# Altium PCB PCB1.PcbDoc
Units mm, origin at the board's own origin, x right, y up, seen from the top; angles counter-clockwise.
Board outline 143.76 x 165.46 mm, 2 copper layers (Top Layer, Bottom Layer); 9 components, 19 nets, 75 pads, 0 vias.
Unrouted connection lines stored in the file: 3.
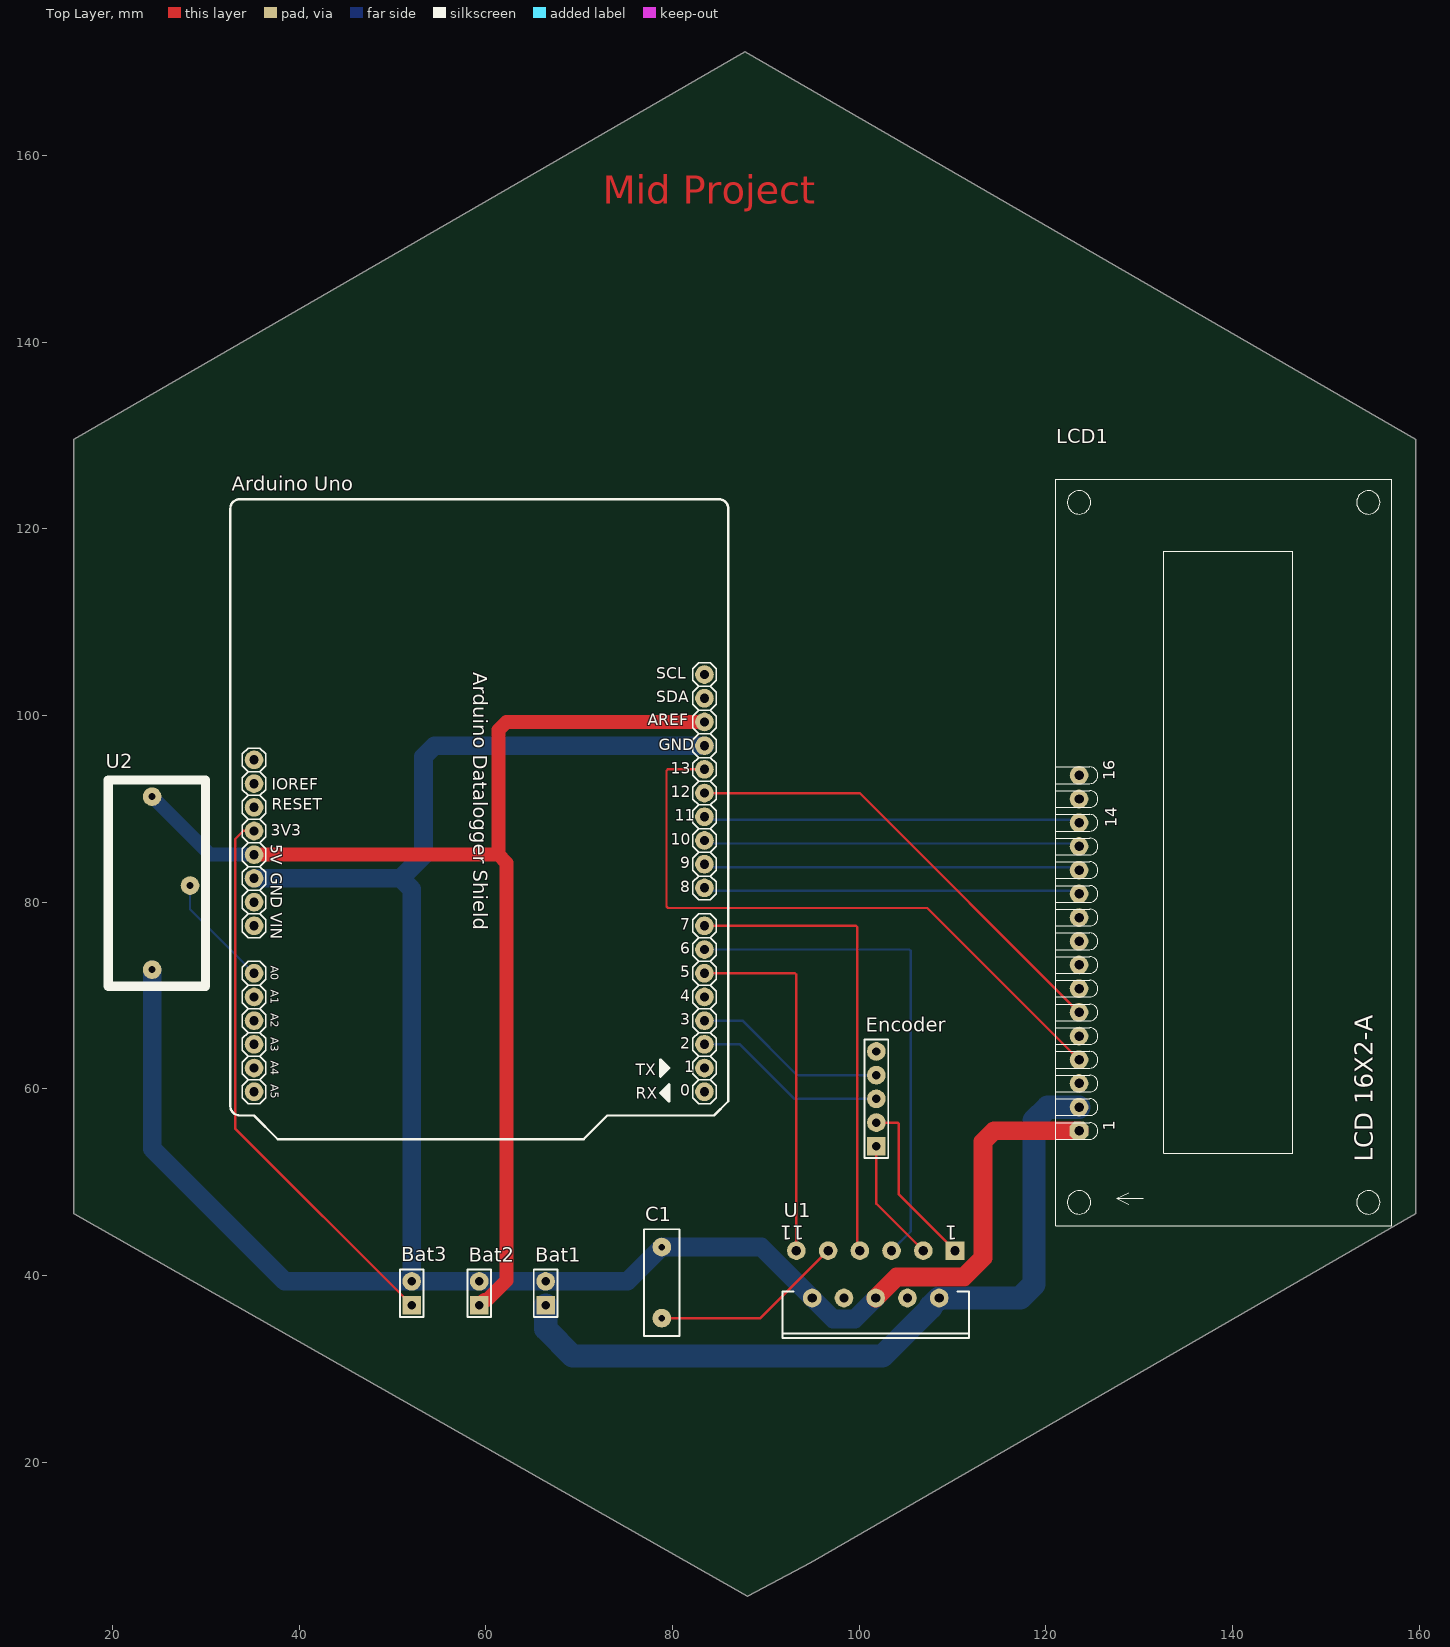
[diagram p0: Top Layer view]
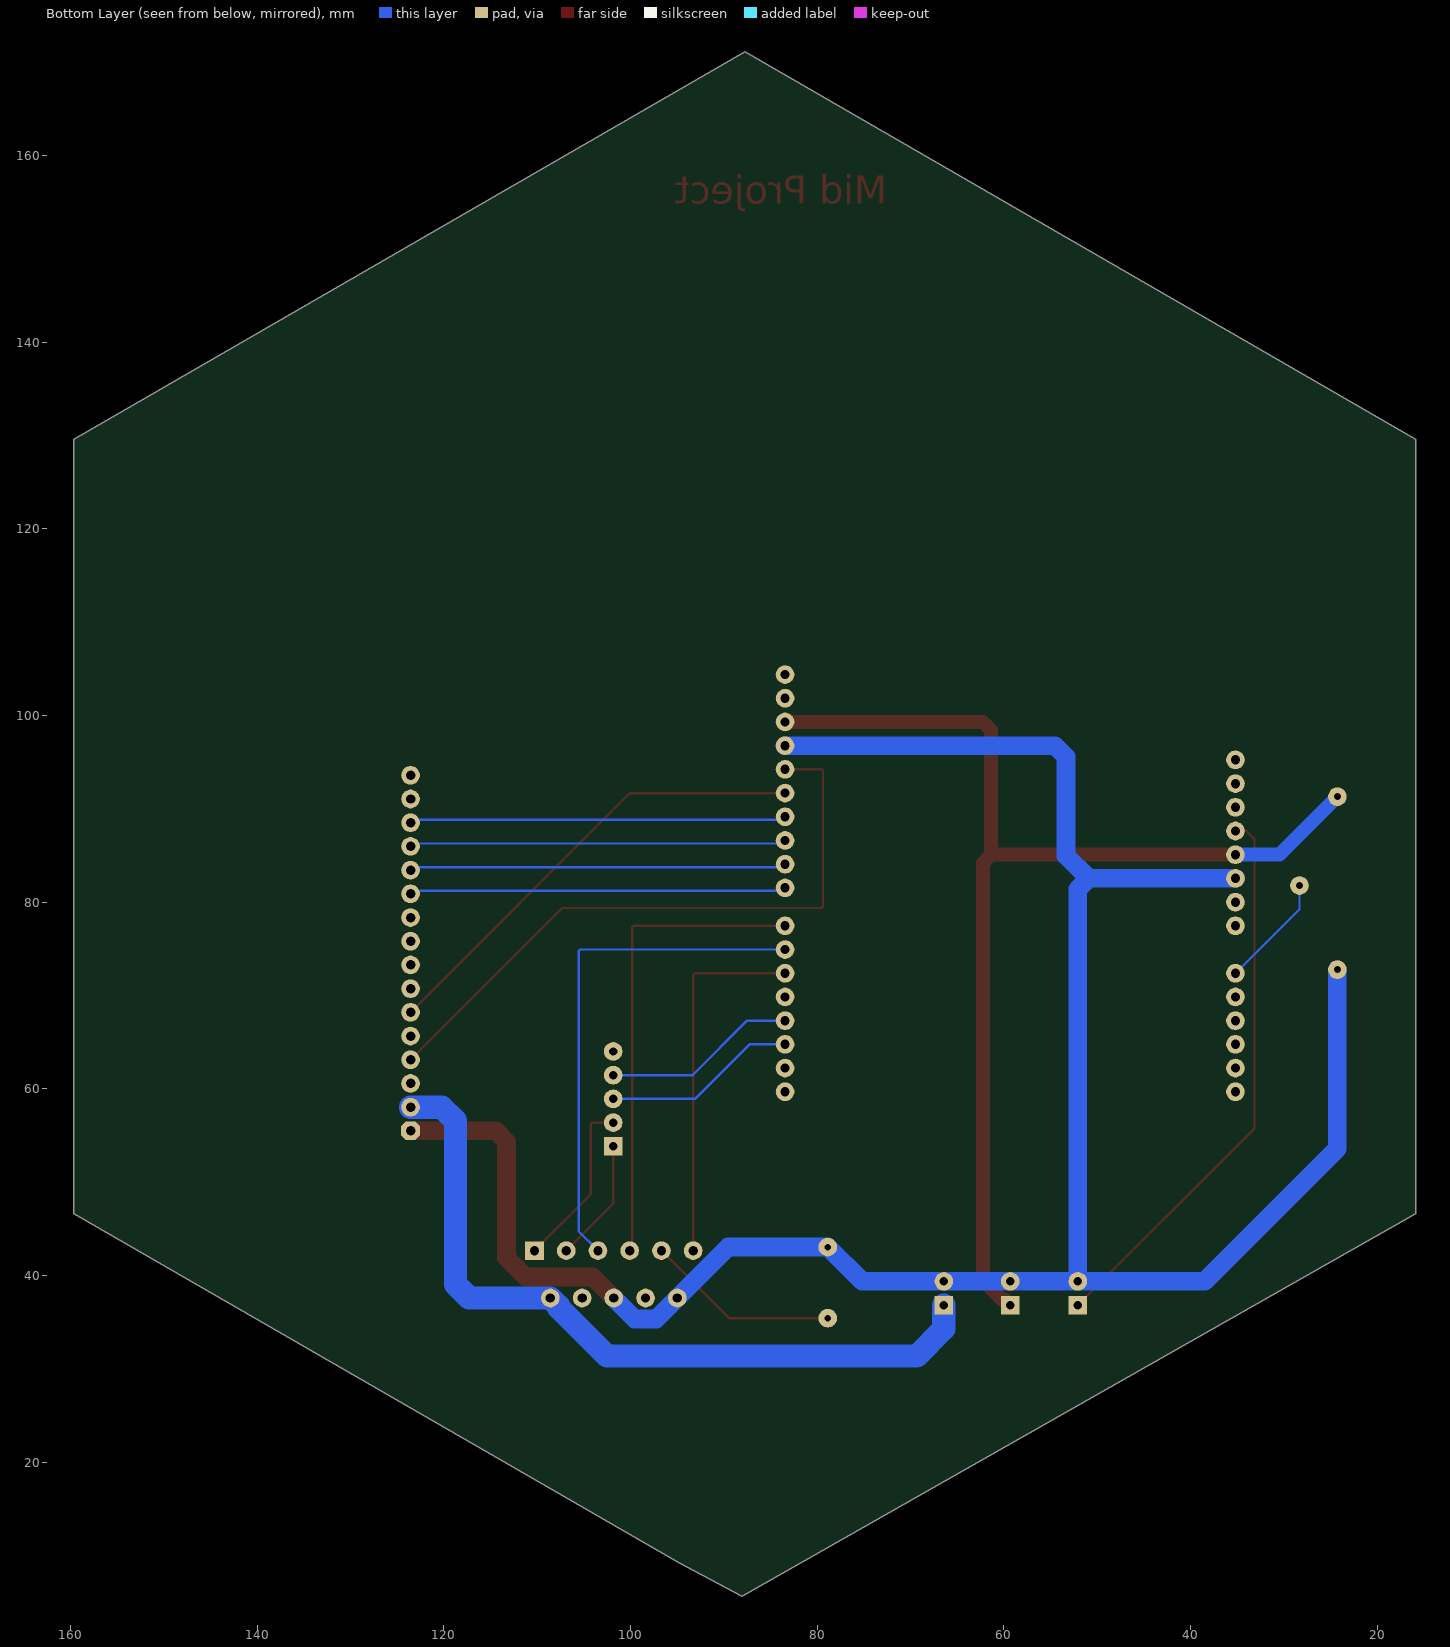
[diagram p1: Bottom Layer view, seen from below]

## Layer stack, top to bottom
Top Solder: solder mask 0.0102, Solder Resist, Dk 3.5
Top Layer: signal copper 0.0356
Dielectric 1: dielectric 0.32, FR-4, Dk 4.8
Bottom Layer: signal copper 0.0356
Bottom Solder: solder mask 0.0102, Solder Resist, Dk 3.5

## Board outline
15.875,46.609 88.066,5.652 94.822,9.216 159.639,46.638 159.639,129.607 87.755,171.109 15.875,129.609

## Design rules (kind name [scope] priority, off if disabled: settings)
Clearance [All] p1: gap=0.254 ignorepadtopadclearanceinfootprint=FALSE except(0: Arc-Hole Track-Hole SMDPad-Hole THPad-Hole Via-Hole Fill-Hole Poly-Hole Region-Hole Text-Hole)
PolygonConnect [All] p1: connectstyle=Relief reliefconductorwidth=0.254 reliefentries=4 polygonreliefangle="90 Angle" airgapwidth=0.254
RoutingVias [All] p1: holewidth=0.711 width=1.27 viastyle="Through Hole" minholewidth=0.711 minwidth=1.27 maxholewidth=0.711 maxwidth=1.27
SolderMaskExpansion [All] p1: expansion=0.102
Width Width_3 [InNet('12v')] p1: maxlimit=2.5 minlimit=2.5 preferedwidth=2.5 minimp=50.000000 maximp=50.000000 favimp=50.000000
Width Width_2 [InNet('VCC')] p2: maxlimit=1.5 minlimit=1.5 preferedwidth=1.5 minimp=50.000000 maximp=50.000000 favimp=50.000000
Width Width_1 [InNet('GND')] p3: maxlimit=2 minlimit=2 preferedwidth=2 minimp=50.000000 maximp=50.000000 favimp=50.000000
Width [All] p4: maxlimit=0.254 minlimit=0.254 preferedwidth=0.254
30 further rules are at their usual default settings.

## Components (designator, comment, footprint, x,y, rotation, side; value= is the part's Value field where it differs from the comment)
"Arduino Uno" "ARDUINO UNO" "ARDUINO UNO" 59.179,87.13 r270 top
Bat1 "Header 2" HDR1X2 66.421,36.83 r90 top
Bat2 "Header 2" HDR1X2 59.309,36.83 r90 top
Bat3 "Header 2" HDR1X2 52.07,36.83 r90 top
C1 "Cap" RAD-0.3 78.867,39.243 r90 top value=100pF
Encoder "Header 5" HDR1X5 101.854,53.848 r90 top
LCD1 "LCD 16X2" "My_LCD 16x2-A" 123.571,55.499 r90 top
U1 "L6203" Multiwatt11 101.785,40.132 r180 top
U2 "LM35" LM35 25.146,81.788 r90 top

## Footprints (in the part's own frame and the unit in brackets; to place one, negate y for a bottom-side part, rotate by r counter-clockwise, add the part's x,y. Pads: shape width x height; smd on the part's side, far side on the other; paste and mask are expansions set on the pad)
"ARDUINO UNO" [mm]
  round 2 hole 1: 0(27.44,24.26) 1(24.9,24.26) 2(22.36,24.26) 3(19.82,24.26) 3.3V(-0.5,-24) 4(17.28,24.26) 5(14.74,24.26) 5V(2.04,-24) 6(12.2,24.26) 7(9.66,24.26) 8(5.596,24.26) 9(3.056,24.26) 10(0.516,24.26) 11(-2.024,24.26) 12(-4.564,24.26) 13(-7.104,24.26) A0(14.74,-24) A1(17.28,-24) A2(19.82,-24) A3(22.36,-24) A4(24.9,-24) A5(27.44,-24) AREF(-12.184,24.26) GND1(7.12,-24) GND2(4.58,-24) GND3(-9.644,24.26) IOREF(-5.58,-24) NC(-8.12,-24) RST(-3.04,-24) SCL(-17.264,24.26) SDA(-14.724,24.26) Vin(9.66,-24)
  silkscreen extent -36.06,-26.54 32.52,26.8
HDR1X2 [mm] "Connector; Header; 2 Position"
  rect 2x2 hole 0.9: 1(0,0)
  round 2 hole 0.9: 2(2.54,0)
  silkscreen extent -1.27,-1.27 3.81,1.27
HDR1X5 [mm] "Connector; Header; 5 Position"
  rect 2x2 hole 0.9: 1(0,0)
  round 2 hole 0.9: 2(2.54,0) 3(5.08,0) 4(7.62,0) 5(10.16,0)
  silkscreen extent -1.27,-1.27 11.43,1.27
LM35 [mm]
  round 2 hole 0.762: 1(9.525,0.889) 2(-9.017,0.889) 3(0,-3.175)
  silkscreen extent -10.79,-4.83 11.3,5.59
Multiwatt11 [mm] "TO, Thru-Hole, Vertical, Heatsink Mounted; 11 Bent Staggered Leads; Pitch 1.7 mm"
  rect 2x2 hole 1: 1(-8.5,-2.54)
  round 2 hole 1: 2(-6.8,2.54) 3(-5.1,-2.54) 4(-3.4,2.54) 5(-1.7,-2.54) 6(0,2.54) 7(1.7,-2.54) 8(3.4,2.54) 9(5.1,-2.54) 10(6.8,2.54) 11(8.5,-2.54)
  silkscreen extent -10,1.83 10,6.83
"My_LCD 16x2-A" [mm]
  oct 2x2 hole 1.016: 1(0,0)
  round 2 hole 1.016: 2(2.54,0) 3(5.08,0) 4(7.62,0) 5(10.16,0) 6(12.7,0) 7(15.24,0) 8(17.78,0) 9(20.32,0) 10(22.86,0) 11(25.4,0) 12(27.94,0) 13(30.48,0) 14(33.02,0) 15(35.56,0) 16(38.1,0)
  silkscreen extent -10.16,-33.5 69.84,2.5, body extent -7.6,-33.8 72.9,2.7, height 20.52
RAD-0.3 [mm] "Radial Cap, Thru-Hole; 2 Leads; 0.3 in Pin Spacing"
  round 2 hole 0.7: 1(-3.81,0) 2(3.81,0)
  silkscreen extent -5.71,-1.91 5.71,1.91

## Part data
Bat1 Bat2 Bat3: "Header, 2-Pin", LatestRevisionDate=17-Jul-2002, LatestRevisionNote="Re-released for DXP Platform.", Publisher="Altium Limited"
C1: "Capacitor", LatestRevisionDate=17-Jul-2002, LatestRevisionNote="Re-released for DXP Platform.", PackageDescription="Radial Cap, Thru-Hole; 2 Leads; 0.3 in Pin Spacing", PackageReference=RAD-0.3, Published=8-Jun-2000, Publisher="Altium Limited"
Encoder: "Header, 5-Pin", LatestRevisionDate=17-Jul-2002, LatestRevisionNote="Re-released for DXP Platform.", Publisher="Altium Limited"
LCD1: "LCD 16X2 Character lcd"
U1: "DMOS Full Bridge Driver", ComponentLink1Description="Manufacturer Link", ComponentLink1URL=http://www.st.com/, ComponentLink2Description=Datasheet, ComponentLink2URL=http://www.st.com/stonline/products/literature/ds/1373/l6201.pdf, DatasheetVersion=Jul-1997, LatestRevisionDate=17-Jul-2002, LatestRevisionNote="Re-released for DXP Platform.", Note="TAB connected to pin 6", PackageDescription="TO, Thru-Hole, Vertical, Heatsink Mounted; 11 Bent Staggered Leads; Pitch 1.7 mm", PackageReference=Multiwatt11, Published=8-Jun-2000, Publisher="Altium Limited"

## Nets (pads, with @x,y where several pads share a name; then routed paths per layer and width w, separated by ;. In a path a pad name is that pad's centre, name@x,y a point inside that pad or via, vN(x,y) a via of type N, cw(c..) or ccw(c..) an arc to the next point about the centre after c; other vN are vias at no path point)
2: "Arduino Uno.2" Encoder.3 | length 20.8
  Bottom Layer w0.254: 83.439,64.77 87.249,64.77 93.091,58.928 Encoder.3
3: "Arduino Uno.3" Encoder.4 | length 20.8
  Bottom Layer w0.254: 83.439,67.31 87.503,67.31 93.345,61.468 Encoder.4
3.3v: "Arduino Uno.3.3V" Bat3.1 | length 60.2
  Top Layer w0.254: 35.179,87.63 35.157,87.652 34.058,87.652 33.147,86.741 33.147,55.753 Bat3.1
12v: Bat1.1 LCD1.2 U1.2 | length 82.3
  Bottom Layer w2.5: Bat1.1 66.421,34.29 69.342,31.369 102.503,31.369 107.689,36.555 107.689,36.696 U1.2 117.281,37.592 118.745,39.056 118.745,56.575 120.209,58.039 LCD1.2
GND: "Arduino Uno.GND1" "Arduino Uno.GND2" "Arduino Uno.GND3" Bat1.2 Bat2.2 Bat3.2 C1.2 LCD1.1 LCD1.3 LCD1.5 U1.6 U1.10 U2.2 | length 248.8
  Top Layer w2: U1.6 104.039,39.846 111.232,39.846 113.284,41.898 113.284,54.327 114.456,55.499 LCD1.1
  Bottom Layer w2: U2.2 24.257,53.594 38.481,39.37 Bat3.2 ; 35.179,82.55 50.898,82.55 ; 83.439,96.774 54.512,96.774 53.34,95.602 53.34,84.992 50.898,82.55 ; U1.6 99.531,35.338 97.239,35.338 U1.10 89.524,43.053 C1.2 75.184,39.37 Bat1.2 Bat2.2 Bat3.2 ; 50.898,82.55 52.07,81.378 Bat3.2
"NetArduino Uno_A0": "Arduino Uno.A0" U2.3 | length 12.2
  Bottom Layer w0.254: U2.3 28.321,79.248 35.179,72.39
NetC1_1: C1.1 U1.9 | length 20.8
  Top Layer w0.254: C1.1 89.446,35.433 U1.9
NetEncoder_1: Encoder.1 U1.3 | length 13.3
  Top Layer w0.254: Encoder.1 101.854,47.703 U1.3
NetEncoder_2: Encoder.2 U1.1 | length 18.5
  Top Layer w0.254: Encoder.2 104.118,56.388 104.267,56.239 104.267,48.69 U1.1
Pin5: "Arduino Uno.5" U1.11 | length 39.5
  Top Layer w0.254: 83.439,72.39 93.136,72.39 93.285,72.241 U1.11
Pin6: "Arduino Uno.6" U1.5 | length 55.1
  Bottom Layer w0.254: 83.439,74.93 105.388,74.93 105.537,74.781 105.537,44.724 U1.5
Pin7: "Arduino Uno.7" U1.7 | length 51.2
  Top Layer w0.254: 83.439,77.47 99.673,77.47 99.822,77.321 99.822,42.935 U1.7
Pin8: "Arduino Uno.8" LCD1.11 | length 40.4
  Bottom Layer w0.254: 83.439,81.534 83.757,81.216 123.253,81.216 LCD1.11
Pin9: "Arduino Uno.9" LCD1.12 | length 40.4
  Bottom Layer w0.254: 83.439,84.074 83.757,83.757 123.253,83.757 LCD1.12
Pin10: "Arduino Uno.10" LCD1.13 | length 40.4
  Bottom Layer w0.254: 83.439,86.614 83.757,86.296 123.253,86.296 LCD1.13
Pin11: "Arduino Uno.11" LCD1.14 | length 40.4
  Bottom Layer w0.254: 83.439,89.154 83.757,88.837 123.253,88.837 LCD1.14
Pin12: "Arduino Uno.12" LCD1.6 | length 49.9
  Top Layer w0.254: 83.439,91.694 100.076,91.694 LCD1.6
Pin13: "Arduino Uno.13" LCD1.4 | length 69.7
  Top Layer w0.254: 83.439,94.234 79.524,94.234 79.375,94.085 79.375,79.524 79.524,79.375 107.315,79.375 LCD1.4
VCC: "Arduino Uno.5V" "Arduino Uno.AREF" Bat2.1 U2.1 | length 125.5
  Top Layer w1.5: 35.179,85.09 61.351,85.09 ; Bat2.1 59.845,37.366 60.139,37.366 62.23,39.457 62.23,84.211 61.351,85.09 ; 83.439,99.314 62.23,99.314 61.351,98.435 61.351,85.09
  Bottom Layer w1.5: U2.1 30.48,85.09 35.179,85.09
pads on no net: "Arduino Uno.0" "Arduino Uno.1" "Arduino Uno.4" "Arduino Uno.A1" "Arduino Uno.A2" "Arduino Uno.A3" "Arduino Uno.A4" "Arduino Uno.A5" "Arduino Uno.IOREF" "Arduino Uno.NC" "Arduino Uno.RST" "Arduino Uno.SCL" "Arduino Uno.SDA" "Arduino Uno.Vin" Encoder.5 LCD1.7 LCD1.8 LCD1.9 LCD1.10 LCD1.15 LCD1.16 U1.4 U1.8

## Other copper
Top Layer:
  text "Mid Project" at 72.517,154.813 h3

## Silkscreen, mask and mechanical layers (free items; w line width, h text height)
Mechanical 1:
  the board outline again, w1

## Text inside footprints (layer, text, board x,y; h text height)
"Arduino Uno": Top Overlay "5V" at 36.957,86.233 h1.21 r270; Top Overlay "A0" at 36.982,73.177 h0.86 r270; Top Overlay "AREF" at 77.382,98.944 h1.21; Top Overlay "GND" at 78.565,96.302 h1.21; Top Overlay "RESET" at 37.084,89.916 h1.21; Top Overlay "3V3" at 36.957,87.122 h1.21; Top Overlay "A1" at 36.982,70.637 h0.86 r270; Top Overlay "A2" at 36.982,68.097 h0.86 r270; Top Overlay "A3" at 36.982,65.557 h0.86 r270; Top Overlay "A4" at 36.982,63.017 h0.86 r270; Top Overlay "A5" at 36.982,60.477 h0.86 r270; Top Overlay "VIN" at 36.957,78.867 h1.21 r270; Top Overlay "GND" at 36.957,83.16 h1.21 r270; Top Overlay "IOREF" at 37.084,92.075 h1.21; Top Overlay "TX" at 76.098,61.468 h1.21; Top Overlay "RX" at 76.073,58.928 h1.21; Top Overlay "13" at 79.848,93.787 h1.21; Top Overlay "12" at 79.848,91.247 h1.21; Top Overlay "11" at 80.251,88.707 h1.21; Top Overlay "10" at 79.848,86.167 h1.21; Top Overlay "9" at 80.855,83.627 h1.21; Top Overlay "8" at 80.855,81.087 h1.21; Top Overlay "7" at 80.855,77.023 h1.21; Top Overlay "6" at 80.855,74.483 h1.21; Top Overlay "5" at 80.855,71.943 h1.21; Top Overlay "4" at 80.855,69.403 h1.21; Top Overlay "3" at 80.855,66.863 h1.21; Top Overlay "2" at 80.855,64.323 h1.21; Top Overlay "1" at 81.258,61.783 h1.21; Top Overlay "0" at 80.855,59.243 h1.21; Top Overlay "SCL" at 78.279,103.93 h1.21; Top Overlay "SDA" at 78.266,101.401 h1.21; Top Overlay "Arduino Datalogger Shield" at 58.679,104.63 h1.52 r270
LCD1: Top Overlay "LCD 16X2-A" at 155.067,52.197 h1.91 r90; Top Overlay "16" at 127.381,93.091 h1.27 r90; Top Overlay "1" at 127.381,55.499 h1.27 r90; Top Overlay "14" at 127.635,88.011 h1.27 r90
U1: Top Overlay "11" at 94.115,45.347 h1.5 r180; Top Overlay "1" at 110.515,45.347 h1.5 r180